# EAGLE board GeneralRefCard (EAGLE 9.6.2)
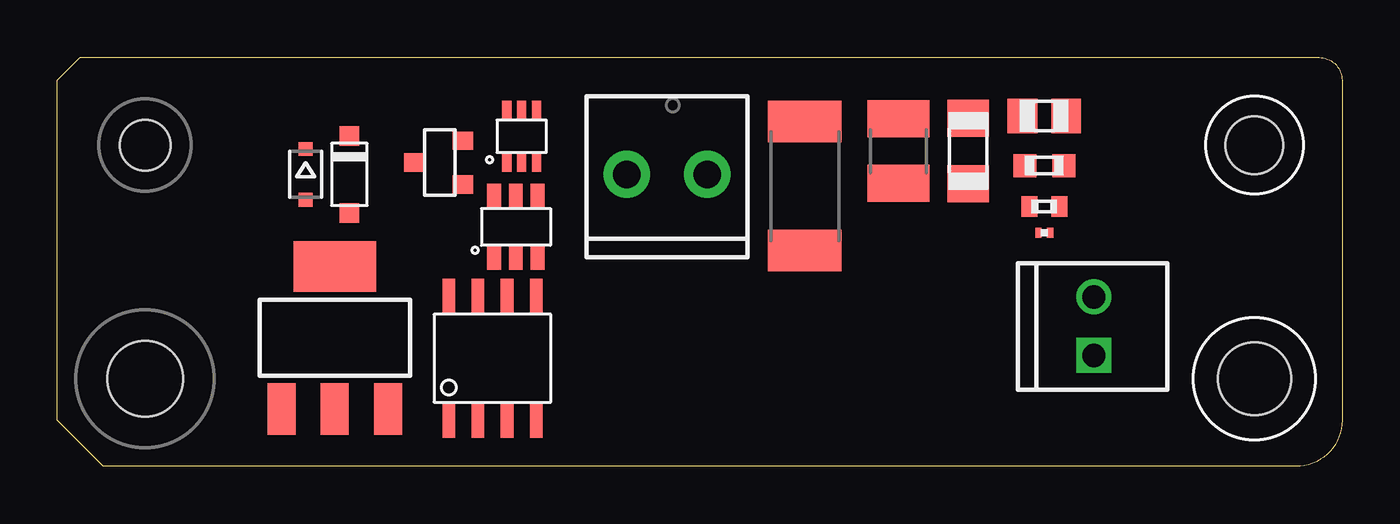
[diagram p0: board, top side]
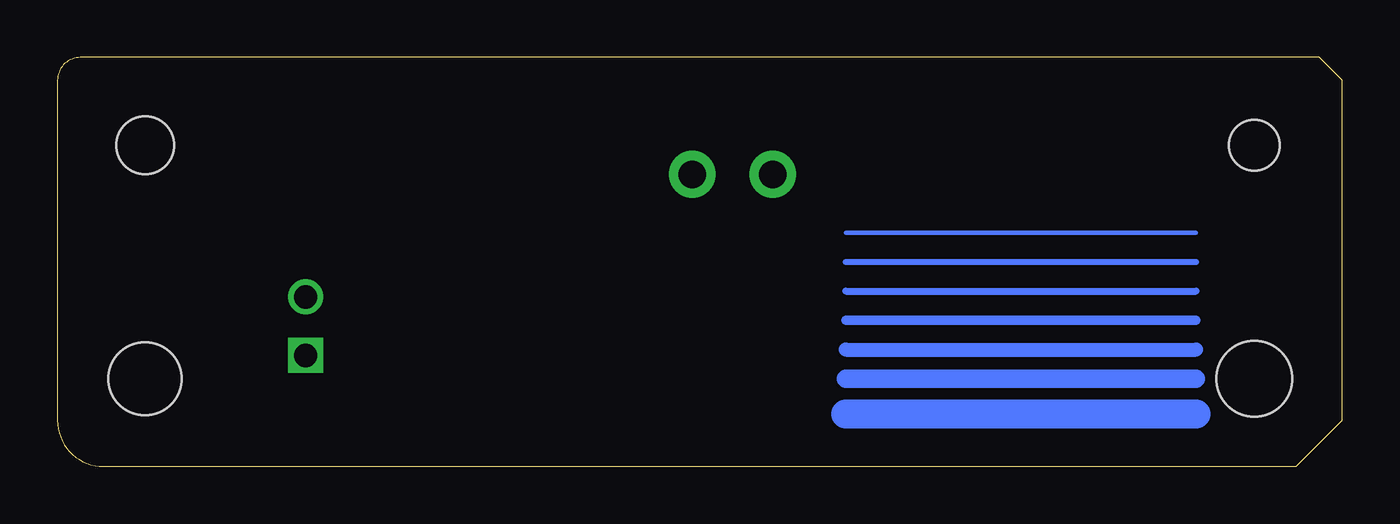
[diagram p1: board, bottom side, seen from below]

Size 55.88 x 17.78 mm. Coordinates in mm from the lower left corner, seen from the top.
Outline: 1,17.78 54.88,17.78 arc-90 55.88,16.78 55.88,2 arc-90 53.88,0 2,0 0,2 0,16.78 1,17.78
Copper layers (1*16): Top 0.035559375mm / dielectric 1.6mm / Bottom 0.035559375mm
Design rules "oshpark-2layer": minimum track width 6mil, minimum drill 10mil, track to track 6mil, track to pad 6mil, pad to pad 6mil, via to via 6mil, smd to smd 6mil, copper to edge 15mil, drill to drill 6mil, minimum pad ring 5mil, minimum via ring 5mil, stop-mask expansion 2.5mil, vias tented up to drill 0mil, thermal gap 10mil
Holes 3.3 mm at 3.81,3.81
Holes 2.2 mm at 3.81,13.97

## Footprints (pad centres in the part's own frame; a part is rotated, then mirrored left to right if it is on the bottom)
SOD-123 = smd 0.85 x 0.85: ANODE 1.675,0; CAT -1.675,0
SOT23-3 = smd 0.8 x 0.9: 1 -0.95,-1; 2 0.95,-1; 3 0,1.1
DCK_R-PDSO-G6 = smd 0.4 x 0.9: 1 -0.65,-1.1; 2 0,-1.1; 3 0.65,-1.1; 4 0.65,1.1; 5 0,1.1; 6 -0.65,1.1
DBV_R-PDSO-G6 = smd 0.6 x 1.05: 1 -0.95,-1.35; 2 0,-1.35; 3 0.95,-1.35; 4 0.95,1.35; 5 0,1.35; 6 -0.95,1.35
SOT223 = smd 1.219 x 2.235: 1 -2.311,-3.099; 2 0,-3.099; 3 2.311,-3.099 | smd 3.6 x 2.2: 4 0,3.099
SOIC_8 = smd 0.55 x 1.5: 1 -2.54,-2.7; 2 -1.27,-2.7; 3 0,-2.7; 4 1.27,-2.7; 5 1.27,2.7; 6 0,2.7; 7 -1.27,2.7; 8 -2.54,2.7
SOD323-R = smd 0.6 x 0.6: A 1.1,0; C -1.1,0
1X02_2.54_SCREWTERM = drill 1.016: P1 1.27,0 | drill 1.016 square: P2 -1.27,0
R0402 = smd 0.7 x 0.9: 1 -0.65,0; 2 0.65,0
R0603 = smd 1 x 1: 1 -0.85,0; 2 0.85,0
R0805 = smd 1.3 x 1.5: 1 -0.95,0; 2 0.95,0
R1206 = smd 1.6 x 1.803: 1 -1.422,0; 2 1.422,0
R1210 = smd 1.6 x 2.7: 1 -1.4,0; 2 1.4,0
R0201 = smd 0.28 x 0.43: 1 -0.255,0; 2 0.255,0
R2512 = smd 1.8 x 3.2: 1 -2.8,0; 2 2.8,0
SCREWTERMINAL-3.5MM-2_ROUND_RESTRICT = drill 1.2 pad 2.032: 1 0,0; 2 3.5,0
2_56 = hole 2.5: 0,0
4_40 = hole 3.175: 0,0

## Placement (x,y rotation side)
E$1  [SOD-123]  12.7,12.7 270 top
E$2  [SOT23-3]  16.64,13.21 90 top
E$3  [DCK_R-PDSO-G6]  20.19,14.35 0 top
E$4  [DBV_R-PDSO-G6]  19.94,10.41 0 top
E$5  [SOT223]  12.06,5.59 0 top
E$6  [SOIC_8]  19.56,4.7 0 top
E$7  [SOD323-R]  10.79,12.7 270 top
E$8  [1X02_2.54_SCREWTERM]  45.09,6.1 90 top
E$9  [R0402]  42.93,11.3 0 top
E$10  [R0603]  42.93,13.08 0 top
E$11  [R0805]  42.93,15.24 0 top
E$12  [R1206]  39.62,13.72 270 top
E$13  [R1210]  36.58,13.72 270 top
E$14  [R0201]  42.93,10.16 180 top
E$15  [R2512]  32.51,12.19 270 top
E$16  [SCREWTERMINAL-3.5MM-2_ROUND_RESTRICT]  24.77,12.7 0 top
E$17  [2_56]  52.07,13.97 0 top
E$18  [4_40]  52.07,3.81 0 top

## Library data of the parts
E$1-E$8 E$16-E$18 = bschulz
E$9-E$15 = bschulz_passives

## Tracks (layer width: path | path; a pad name or v marks a point on that pad's centre or on a via)
S$1
  Bottom 0.203: 21.59,10.16 6.35,10.16
S$2
  Bottom 0.254: 21.59,8.89 6.35,8.89
S$3
  Bottom 0.305: 21.59,7.62 6.35,7.62
S$4
  Bottom 0.406: 21.59,6.35 6.35,6.35
S$5
  Bottom 0.61: 21.59,5.08 6.35,5.08
S$6
  Bottom 0.813: 21.59,3.81 6.35,3.81
S$7
  Bottom 1.27: 21.59,2.29 6.35,2.29

## Text on the board
tDocu: 3.5mm | 2512 | 1210 | 1206 | SOD | SOT23 | 0805 | SC70 | 323 | 123 | 0603 | M2 | 0402 | 2-56 | SOT23 | 0201 | Bobby Schulz | M3 | DeadBeef - 0.6096mm | 0.1" | 4-40 | SOT223 | DeadBeef - 0.8128mm | SOIC8 | DeadBeef - 1.016mm | DeadBeef - 1.27mm | DeadBeef - 1.778mm
bDocu: 1mm | 1mm | "I keep warning you. / Doors and corners, kid. / That's where they get you." / - Miller | Bobby Schulz / Ref Card / v0.0 | mm / 0.2032 / 0.254 / 0.3048 / 0.4064 / 0.6096 / 0.8128 / 1.27 | DeadBeef - 24mil | mil / 8 / 12 / 16 / 24 / 32 / 50 | DeadBeef - 32mil | DeadBeef - 40mil | DeadBeef - 50mil | DeadBeef - 70mil | 2mm | 2mm